# EAGLE board GiGaPower (EAGLE 7.1.0)
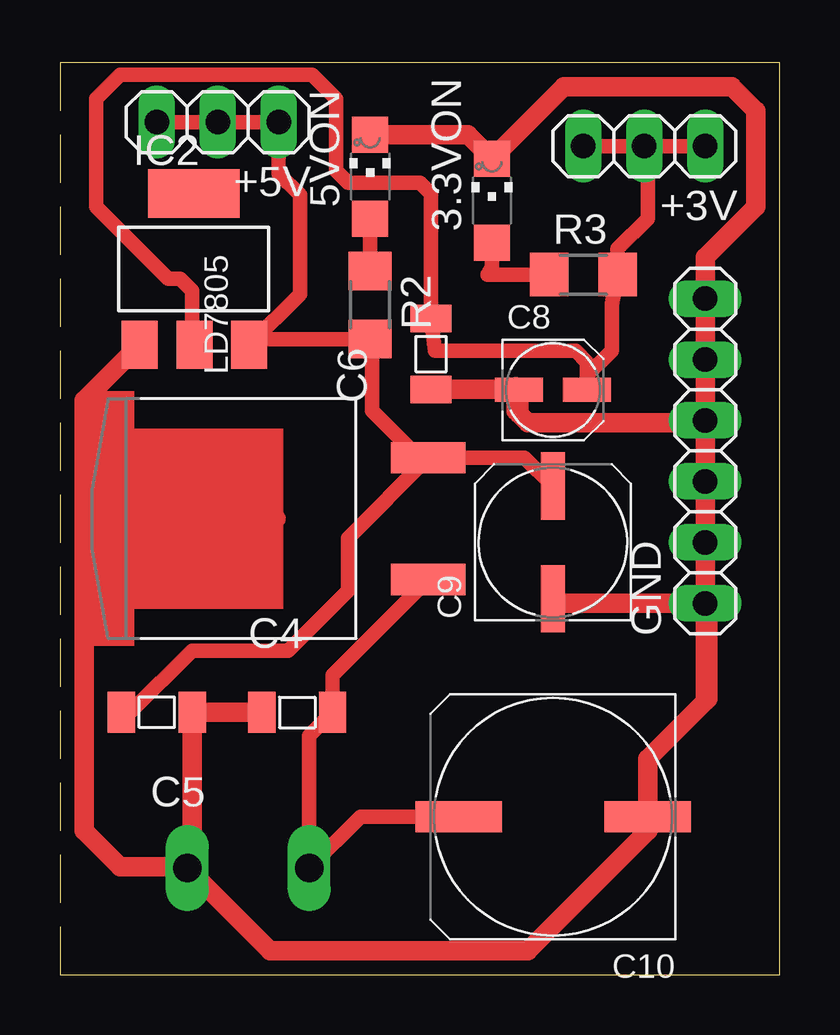
[diagram p0: board, top side]
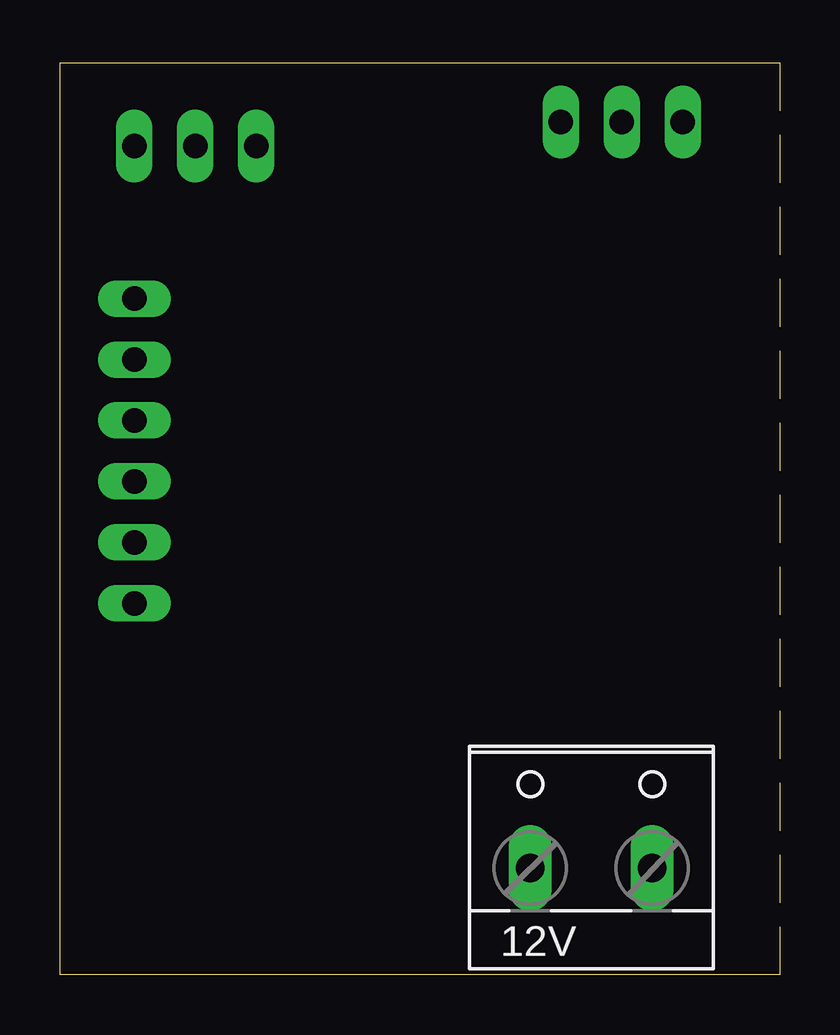
[diagram p1: board, bottom side, seen from below]

Size 30 x 38 mm. Coordinates in mm from the lower left corner, seen from the top.
Outline: 0,0 30,0 30,38 0,38 0,0
Copper layers (1*16): Top 0.035mm / dielectric 1.5mm / Bottom 0.035mm
Design rules "default *": minimum track width 10mil, minimum drill 24mil, track to track 20mil, track to pad 15mil, pad to pad 15mil, via to via 15mil, smd to smd 15mil, copper to edge 40mil, drill to drill 8mil, minimum pad ring 10mil, minimum via ring 8mil, stop-mask expansion 4mil, vias tented up to drill 0mil, thermal gap 10mil

## Footprints (pad centres in the part's own frame; a part is rotated, then mirrored left to right if it is on the bottom)
CHIPLED_1206 = smd 1.5 x 1.5: A 0,-1.75; C 0,1.75
W237-132 = drill 1.194 long: 1 -2.54,-0.635; 2 2.54,-0.635
1X03 = drill 1.016 long: 1 -2.54,0; 2 0,0; 3 2.54,0
1206 = smd 1.143 x 1.702: 1 -1.473,0; 2 1.473,0
UD-4X5,8_NICHICON = smd 2 x 1: + 1.425,0; - -1.425,0
UD-6,3X7,7_NICHICON = smd 2.8 x 1: + 2.35,0; - -2.35,0
UD-10X10_NICHICON = smd 3.6 x 1.3: + 3.925,0; - -3.95,0
1X06 = drill 1.016 long: 1 -6.35,0; 2 -3.81,0; 3 -1.27,0; 4 1.27,0; 5 3.81,0; 6 6.35,0
SOT223 = smd 1.499 x 2.007: 1 -2.261,-3.15; 2 0.025,-3.15; 3 2.311,-3.15 | smd 3.81 x 2.007: 4 0,3.15
SOT404 = smd 1.3 x 3.1: 1 -2.54,-6.35; 3 2.54,-6.35 | smd 0 x 0: MB 0,0
R1206 = smd 1.6 x 1.803: 1 -1.422,0; 2 1.422,0

## Placement (x,y rotation side)
3.3VON  YELLOW  [CHIPLED_1206]  18.01,32.25 0 top
5VON  RED  [CHIPLED_1206]  12.93,33.25 0 top
12V  [W237-132]  7.85,5.08 0 bottom
+3V  [1X03]  24.36,34.52 180 top
+5V  [1X03]  6.58,35.52 180 top
C4  100n  [1206]  9.89,10.93 0 top
C5  100n  [1206]  4.04,10.93 180 top
C6  100n  [1206]  15.47,25.86 90 top
C8  10m  [UD-4X5,8_NICHICON]  20.55,24.36 0 top
C9  220m  [UD-6,3X7,7_NICHICON]  20.55,18.01 90 top
C10  470m  [UD-10X10_NICHICON]  20.55,6.58 180 top
GND  [1X06]  26.9,21.82 90 top
IC2  REG1117  [SOT223]  5.58,29.4 0 top
LD7805  BTA316-600BB  [SOT404]  9,19 90 top
R2  1k  [R1206]  12.93,27.9 270 top
R3  1k  [R1206]  21.82,29.17 0 top

## Library data of the parts
3.3VON 5VON = led
12V = con-wago-508; OC_FARNELL: unknown; OC_NEWARK: unknown
+3V +5V GND = pinhead
C4-C6 = capsmd
C8-C10 R2 R3 = rcl
IC2 = burr-brown; MPN: REG1117; OC_FARNELL: 1097566; OC_NEWARK: 14P6981
LD7805 = nxp_60; 12NC: 9340 601 04118

## Nets
GND: 3.3VON.C 5VON.C 12V.2 C4.1 C5.1 C6.1 C8.- C9.- C10.- GND.1 GND.2 GND.3 GND.4 GND.5 GND.6 IC2.1 LD7805.MB
N$1: 12V.1 C4.2 C10.+ LD7805.1
N$2: +5V.1 +5V.2 +5V.3 C5.2 C9.+ IC2.3 LD7805.3 R2.2
N$3: +3V.1 +3V.2 +3V.3 C6.2 C8.+ IC2.2 R3.2
N$4: 5VON.A R2.1
N$6: 3.3VON.A R3.1

## Tracks (layer width: path | path; a pad name or v marks a point on that pad's centre or on a via)
GND
  Top 0.813: 12V.2 5.51,4.45 C5.1 C4.1 | LD7805.MB 1,19 | 1,19 1,6 2.5,4.5 5.25,4.5 12V.2 | 1,19 1,23.93 IC2.1 | 5VON.C 17.01,35 3.3VON.C 21.01,37 28,37 29,36 29,32 26.9,29.9 GND.6 GND.5 GND.4 | 19.12,23.38 C8.- 19.1,24.39 C6.1 18.89,24.39 19,24.5 19,23.5 19.12,23.38 | 19.12,23.38 19.5,23 26.81,23 | 26.81,23 GND.4 | GND.4 26.9,23 | 26.9,23 GND.3 | GND.3 GND.2 GND.1 | GND.1 20.74,15.47 C9.- | 26.9,11.4 27,11.5 27,15.37 GND.1 | 26.81,23 26.9,23 | GND.1 26.9,11.4 | 26.9,11.4 24.5,9 C10.- 24.5,6 19.5,1 8.75,1 12V.2 | GND.3 GND.4
N$1
  Top 0.61: C10.+ 12.53,6.58 12V.1 10.39,9.96 C4.2 11.36,12.47 LD7805.1
N$2
  Top 0.61: 20.48,20.29 C9.+ 19.37,21.54 LD7805.3 | +5V.3 +5V.2 +5V.1 9.12,33.38 10,32.5 10,28.36 IC2.3 8.12,26.48 R2.2 13,26.41 13,23.5 14.96,21.54 LD7805.3 | C5.2 2.93,10.93 5.5,13.5 9.5,13.5 12,16 12,18.19 LD7805.3
N$3
  Top 0.61: C8.+ 21.98,24.98 | 21.98,24.98 23,26 23,27.93 R3.2 23.24,30.24 24.5,31.5 24.5,34.38 +3V.2 | +3V.1 +3V.2 | +3V.2 +3V.3 | 21.98,24.98 21.98,25.52 21.5,26 15.64,26 C6.2 15.47,32.53 15,33 12,33 11.5,33.5 11.5,36.5 10.5,37.5 2.5,37.5 1.5,36.5 1.5,32 4.5,29 5,29 5.5,28.5 5.5,26.36 IC2.2
N$4
  Top 0.61: R2.1 5VON.A
N$6
  Top 0.61: R3.1 17.83,29.17 18,29.5 3.3VON.A